# EAGLE board out-7.1 (EAGLE 6.0), part 1 of 3
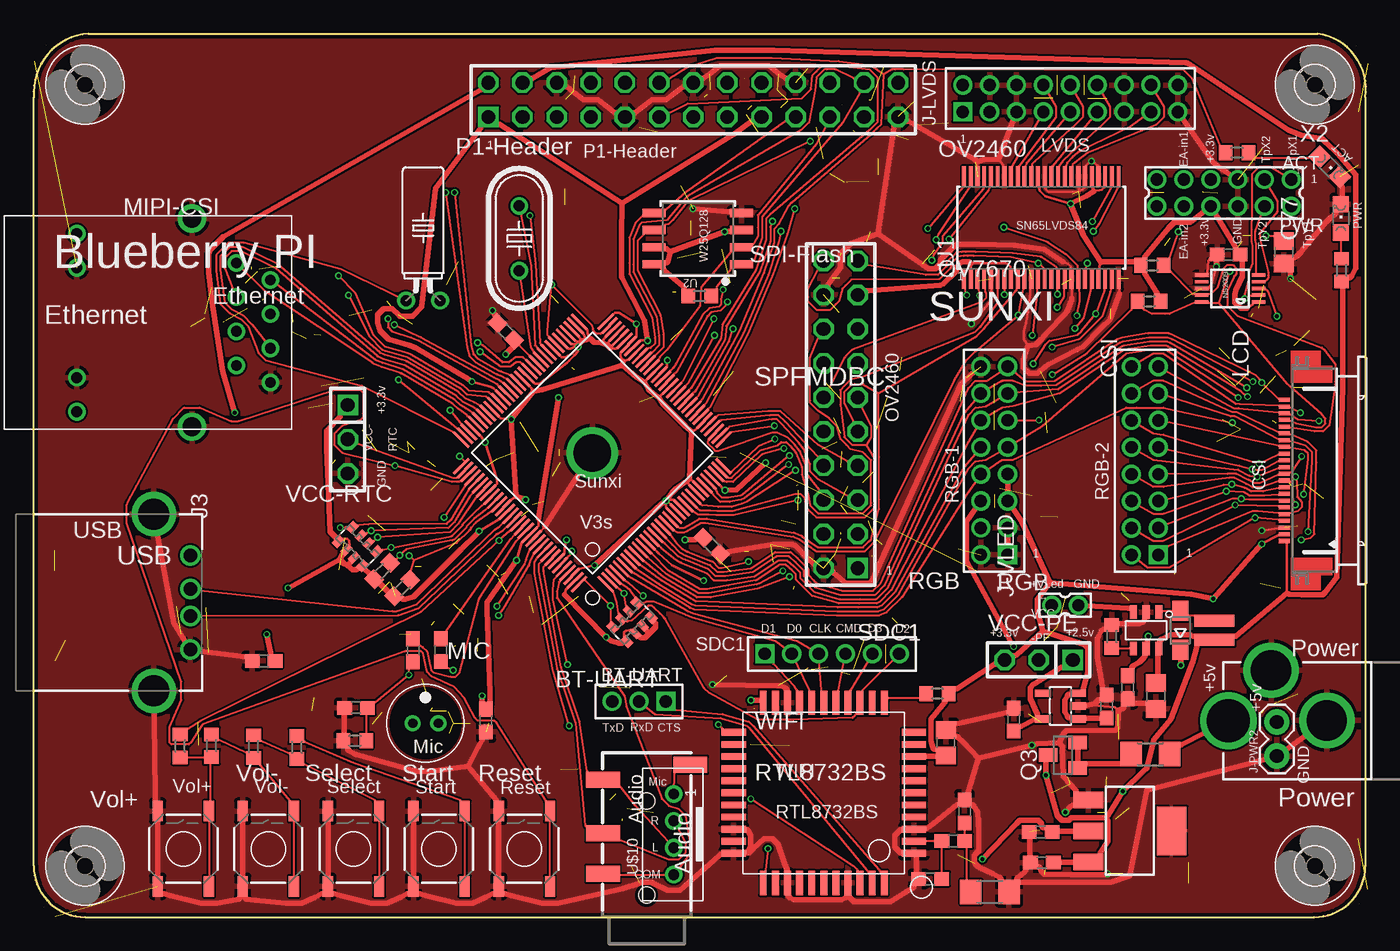
[diagram p0: board, top side]
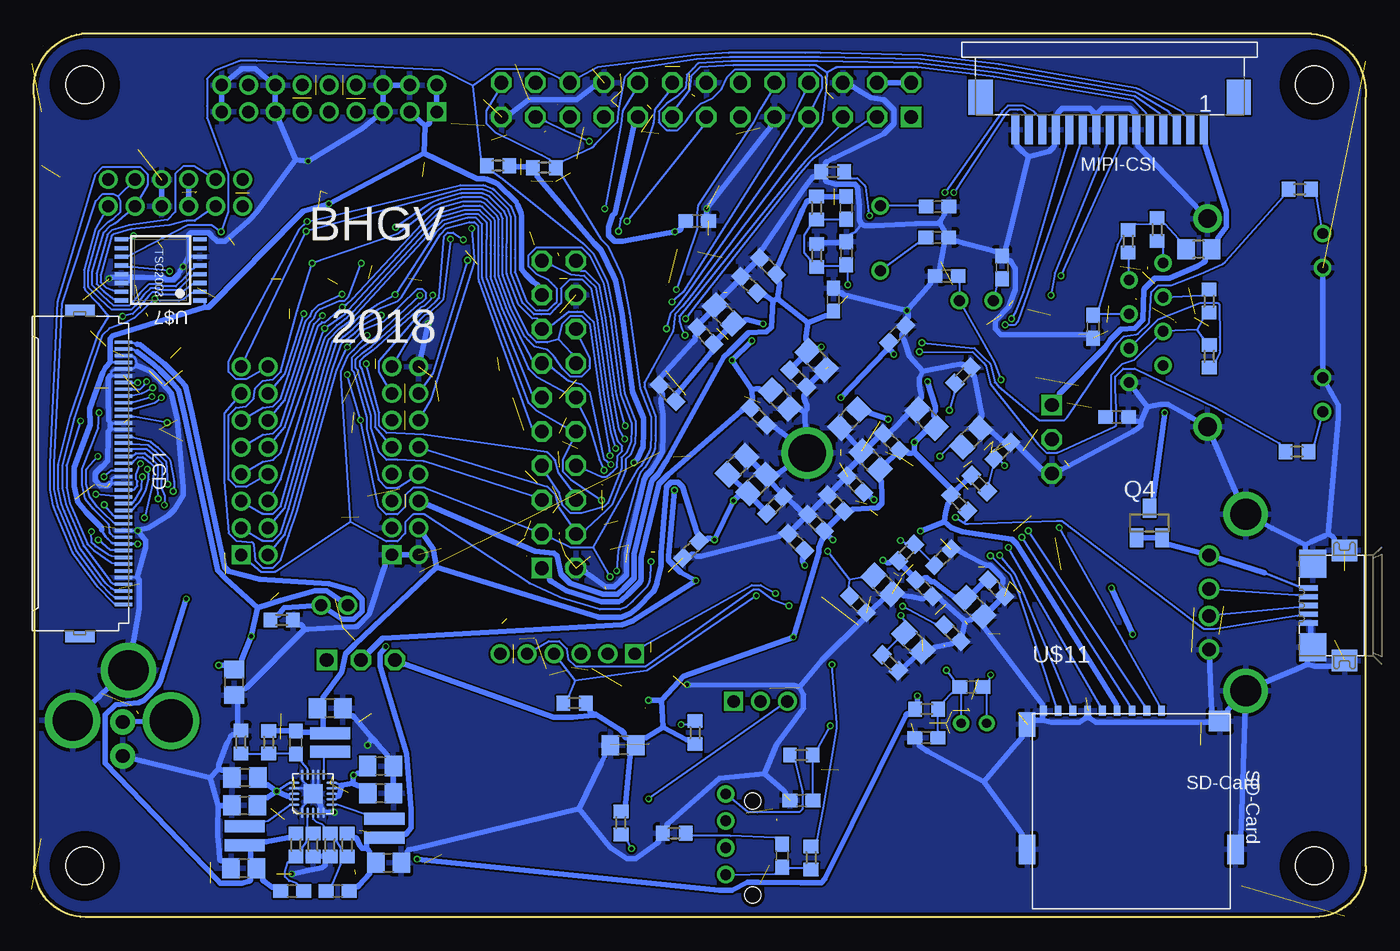
[diagram p1: board, bottom side, seen from below]

Size 99.11 x 65.7 mm. Coordinates in mm from the lower left corner, seen from the top.
Outline: 3.82,0 95.26,0 arc90 99.07,3.81 99.07,60.96 arc90 95.51,65.7 4.07,65.7 arc90 0.01,60.96 0.01,3.81 arc90 3.82,0
Copper layers 1+16: TOP 0.035mm / dielectric 0.15mm / BOTTOM 0.035mm
Design rules: minimum track width 0.1524mm, track to track 0.1524mm, copper to edge 0.254mm, minimum pad ring 0.1mm, minimum via ring 0.1mm
Net classes: 0 default: width 0.152 mm, clearance 0.152 mm; 1 pwr: width 0.178 mm, clearance 0.3 mm to class 0, clearance 0.152 mm

## Footprints (pad centres in the part's own frame; a part is rotated, then mirrored left to right if it is on the bottom)
R1206 = smd 1.6 x 1.803: 1 -1.422,0; 2 1.422,0
C0603 = smd 1.1 x 1: 1 -0.85,0; 2 0.85,0
C0805 = smd 1.3 x 1.5: 1 -0.95,0; 2 0.95,0
C0805' = smd 1.3 x 1.5: 1 -0.85,0; 2 0.85,0
SOD323-W = smd 1.5 x 1.2: A 1.45,0; C -1.45,0
2,8 = hole 2.8: 0,0
SOT223 = smd 1.219 x 2.235: 1 -2.311,-3.099; 2 0,-3.099; 3 2.311,-3.099 | smd 3.6 x 2.2: 4 0,3.099
AUDIO_JACK_3.5MM_TRRS_SMD_RA = smd 1.2 x 2.5: EARTH 11.3,-3.25; RING1 6.2,3.25; RING2 3.2,3.25; TIP 10.2,3.25 | hole 1.2: 8.6,0; 1.6,0
USB-A-FEMALE = drill 1 pad 1.508: 1 -3.5,2.71; 2 -1,2.71; 3 1,2.71; 4 3.5,2.71 | drill 2.3 pad 3.316: P$1 6.57,0; P$2 -6.57,0
68611514122 = smd 0.6 x 2.2: 1 -7,2.4; 2 -6,2.4; 3 -5,2.4; 4 -4,2.4; 5 -3,2.4; 6 -2,2.4; 7 -1,2.4; 8 0,2.4; 9 1,2.4; 10 2,2.4; 11 3,2.4; 12 4,2.4; 13 5,2.4; 14 6,2.4; 15 7,2.4 | smd 1.8 x 2.6: Z1 -9.6,0; Z2 9.6,0
52745-2290 = smd 0.3 x 0.8: 1 -5.25,2.5; 2 -4.75,2.5; 3 -4.25,2.5; 4 -3.75,2.5; 5 -3.25,2.5; 6 -2.75,2.5; 7 -2.25,2.5; 8 -1.75,2.5; 9 -1.25,2.5; 10 -0.75,2.5; 11 -0.25,2.5; 12 0.25,2.5; 13 0.75,2.5; 14 1.25,2.5; 15 1.75,2.5; 16 2.25,2.5; 17 2.75,2.5; 18 3.25,2.5; 19 3.75,2.5; 20 4.25,2.5; 21 4.75,2.5; 22 5.25,2.5
XF2H-4015-1LW = smd 1.3 x 0.25: 1 3.175,9.75; 2 3.175,9.25; 3 3.175,8.75; 4 3.175,8.25; 5 3.175,7.75; 6 3.175,7.25; 7 3.175,6.75; 8 3.175,6.25; 9 3.175,5.75; 10 3.175,5.25; 11 3.175,4.75; 12 3.175,4.25; 13 3.175,3.75; 14 3.175,3.25; 15 3.175,2.75; 16 3.175,2.25; 17 3.175,1.75; 18 3.175,1.25; 19 3.175,0.75; 20 3.175,0.25; 21 3.175,-0.25; 22 3.175,-0.75; 23 3.175,-1.25; 24 3.175,-1.75; 25 3.175,-2.25; 26 3.175,-2.75; 27 3.175,-3.25; 28 3.175,-3.75; 29 3.175,-4.25; 30 3.175,-4.75; 31 3.175,-5.25; 32 3.175,-5.75; 33 3.175,-6.25; 34 3.175,-6.75; 35 3.175,-7.25; 36 3.175,-7.75; 37 3.175,-8.25; 38 3.175,-8.75; 39 3.175,-9.25; 40 3.175,-9.75 | smd 2.2 x 0.8: M1 -0.075,12.15; M2 -0.075,-12.15
PINHEAD_2X09M = drill 0.914 pad 1.422 square: 1 -8,-1 | drill 0.914 pad 1.422: 2 -8,1; 3 -6,-1; 4 -6,1; 5 -4,-1; 6 -4,1; 7 -2,-1; 8 -2,1; 9 0,-1; 10 0,1; 11 2,-1; 12 2,1; 13 4,-1; 14 4,1; 15 6,-1; 16 6,1; 17 8,-1; 18 8,1
POWER_JACK_PTH_LOCK = drill 2.997 pad 4.115: GND 0.025,6.557; GNDBREAK 3.762,10.7 | drill 3.2 pad 4.216: PWR 0,13.878
1X02 = drill 1.016 pad 1.88: 1 0,0; 2 2.54,0
87758-0216 = drill 0.9 pad 1.408: 1 0,-1; 2 0,1
2X13 = drill 1.016 pad 1.524 square: 1 -15.24,-1.27 | drill 1.016 pad 1.524 octagon: 2 -15.24,1.27; 3 -12.7,-1.27; 4 -12.7,1.27; 5 -10.16,-1.27; 6 -10.16,1.27; 7 -7.62,-1.27; 8 -7.62,1.27; 9 -5.08,-1.27; 10 -5.08,1.27; 11 -2.54,-1.27; 12 -2.54,1.27; 13 0,-1.27; 14 0,1.27; 15 2.54,-1.27; 16 2.54,1.27; 17 5.08,-1.27; 18 5.08,1.27; 19 7.62,-1.27; 20 7.62,1.27; 21 10.16,-1.27; 22 10.16,1.27; 23 12.7,-1.27; 24 12.7,1.27; 25 15.24,-1.27; 26 15.24,1.27
1X06M = drill 0.914 pad 1.422 square: 1 -5,0 | drill 0.914 pad 1.422: 2 -3,0; 3 -1,0; 4 1,0; 5 3,0; 6 5,0
1X03 = drill 1.016 pad 1.524 square: 1 -2.54,0 | drill 1.016 pad 1.524 octagon: 2 0,0; 3 2.54,0
1X03M = drill 0.914 pad 1.422 square: 1 -2,0 | drill 0.914 pad 1.422: 2 0,0; 3 2,0
2X10 = drill 1.016 pad 1.524 square: 1 -11.43,-1.27 | drill 1.016 pad 1.524 octagon: 2 -11.43,1.27; 3 -8.89,-1.27; 4 -8.89,1.27; 5 -6.35,-1.27; 6 -6.35,1.27; 7 -3.81,-1.27; 8 -3.81,1.27; 9 -1.27,-1.27; 10 -1.27,1.27; 11 1.27,-1.27; 12 1.27,1.27; 13 3.81,-1.27; 14 3.81,1.27; 15 6.35,-1.27; 16 6.35,1.27; 17 8.89,-1.27; 18 8.89,1.27; 19 11.43,-1.27; 20 11.43,1.27
2X08M = drill 0.914 pad 1.422 square: 1 -7,-1 | drill 0.914 pad 1.422: 2 -7,1; 3 -5,-1; 4 -5,1; 5 -3,-1; 6 -3,1; 7 -1,-1; 8 -1,1; 9 1,-1; 10 1,1; 11 3,-1; 12 3,1; 13 5,-1; 14 5,1; 15 7,-1; 16 7,1
ODD-INDUCTOR = smd 0.9 x 3: P$1 -0.7,0; P$2 0.7,0
L0805 = smd 1.3 x 1.5: 1 -0.95,0; 2 0.95,0
CHIPLED_0805 = smd 1.2 x 1.2: A 0,-1.05; C 0,1.05
F6035AP = drill 0.7 pad 1.208: 1 0,0.95; 2 0,-0.95
HC49U-V = drill 0.813 pad 1.321: 1 -2.413,0; 2 2.413,0
TC38H = drill 0.813 pad 1.321: 1 -1.27,0; 2 1.27,0
SOT23 = smd 1 x 1.4: 1 -0.95,-1.1; 2 0.95,-1.1; 3 0,1.1
R0603 = smd 1 x 1.1: 1 -0.85,0; 2 0.85,0
EXB38V = smd 0.6 x 0.8: 1 -1.275,-0.75; 4 1.275,-0.75; 5 1.275,0.75; 8 -1.275,0.75 | smd 0.5 x 0.8: 2 -0.4,-0.75; 3 0.4,-0.75; 6 0.4,0.75; 7 -0.4,0.75
SPARKFUN-SWITCHES_TACTILE_SWITCH_SMD_5.2MM = smd 1.524 x 0.762: 1 -2.794,1.905; 2 2.794,1.905; 3 -2.794,-1.905; 4 2.794,-1.905
TFSOP-48-6.1MM = smd 1.5 x 0.29: 1 -3.8,5.75; 2 -3.8,5.25; 3 -3.8,4.75; 4 -3.8,4.25; 5 -3.8,3.75; 6 -3.8,3.25; 7 -3.8,2.75; 8 -3.8,2.25; 9 -3.8,1.75; 10 -3.8,1.25; 11 -3.8,0.75; 12 -3.8,0.25; 13 -3.8,-0.25; 14 -3.8,-0.75; 15 -3.8,-1.25; 16 -3.8,-1.75; 17 -3.8,-2.25; 18 -3.8,-2.75; 19 -3.8,-3.25; 20 -3.8,-3.75; 21 -3.8,-4.25; 22 -3.8,-4.75; 23 -3.8,-5.25; 24 -3.8,-5.75; 25 3.8,-5.75; 26 3.8,-5.25; 27 3.8,-4.75; 28 3.8,-4.25; 29 3.8,-3.75; 30 3.8,-3.25; 31 3.8,-2.75; 32 3.8,-2.25; 33 3.8,-1.75; 34 3.8,-1.25; 35 3.8,-0.75; 36 3.8,-0.25; 37 3.8,0.25; 38 3.8,0.75; 39 3.8,1.25; 40 3.8,1.75; 41 3.8,2.25; 42 3.8,2.75; 43 3.8,3.25; 44 3.8,3.75; 45 3.8,4.25; 46 3.8,4.75; 47 3.8,5.25; 48 3.8,5.75
SOIC-8 = smd 0.61 x 1.702: 1 -1.905,-3.251; 2 -0.635,-3.251; 3 0.635,-3.251; 4 1.905,-3.251; 5 1.905,3.251; 6 0.635,3.251; 7 -0.635,3.251; 8 -1.905,3.251
QFP-128 = smd 0.2 x 1.6: 1 -6.2,-7.6; 2 -5.8,-7.6; 3 -5.4,-7.6; 4 -5,-7.6; 5 -4.6,-7.6; 6 -4.2,-7.6; 7 -3.8,-7.6; 8 -3.4,-7.6; 9 -3,-7.6; 10 -2.6,-7.6; 11 -2.2,-7.6; 12 -1.8,-7.6; 13 -1.4,-7.6; 14 -1,-7.6; 15 -0.6,-7.6; 16 -0.2,-7.6; 17 0.2,-7.6; 18 0.6,-7.6; 19 1,-7.6; 20 1.4,-7.6; 21 1.8,-7.6; 22 2.2,-7.6; 23 2.6,-7.6; 24 3,-7.6; 25 3.4,-7.6; 26 3.8,-7.6; 27 4.2,-7.6; 28 4.6,-7.6; 29 5,-7.6; 30 5.4,-7.6; 31 5.8,-7.6; 32 6.2,-7.6; 65 6.2,7.6; 66 5.8,7.6; 67 5.4,7.6; 68 5,7.6; 69 4.6,7.6; 70 4.2,7.6; 71 3.8,7.6; 72 3.4,7.6; 73 3,7.6; 74 2.6,7.6; 75 2.2,7.6; 76 1.8,7.6; 77 1.4,7.6; 78 1,7.6; 79 0.6,7.6; 80 0.2,7.6; 81 -0.2,7.6; 82 -0.6,7.6; 83 -1,7.6; 84 -1.4,7.6; 85 -1.8,7.6; 86 -2.2,7.6; 87 -2.6,7.6; 88 -3,7.6; 89 -3.4,7.6; 90 -3.8,7.6; 91 -4.2,7.6; 92 -4.6,7.6; 93 -5,7.6; 94 -5.4,7.6; 95 -5.8,7.6; 96 -6.2,7.6 | smd 1.6 x 0.2: 33 7.6,-6.2; 34 7.6,-5.8; 35 7.6,-5.4; 36 7.6,-5; 37 7.6,-4.6; 38 7.6,-4.2; 39 7.6,-3.8; 40 7.6,-3.4; 41 7.6,-3; 42 7.6,-2.6; 43 7.6,-2.2; 44 7.6,-1.8; 45 7.6,-1.4; 46 7.6,-1; 47 7.6,-0.6; 48 7.6,-0.2; 49 7.6,0.2; 50 7.6,0.6; 51 7.6,1; 52 7.6,1.4; 53 7.6,1.8; 54 7.6,2.2; 55 7.6,2.6; 56 7.6,3; 57 7.6,3.4; 58 7.6,3.8; 59 7.6,4.2; 60 7.6,4.6; 61 7.6,5; 62 7.6,5.4; 63 7.6,5.8; 64 7.6,6.2; 97 -7.6,6.2; 98 -7.6,5.8; 99 -7.6,5.4; 100 -7.6,5; 101 -7.6,4.6; 102 -7.6,4.2; 103 -7.6,3.8; 104 -7.6,3.4; 105 -7.6,3; 106 -7.6,2.6; 107 -7.6,2.2; 108 -7.6,1.8; 109 -7.6,1.4; 110 -7.6,1; 111 -7.6,0.6; 112 -7.6,0.2; 113 -7.6,-0.2; 114 -7.6,-0.6; 115 -7.6,-1; 116 -7.6,-1.4; 117 -7.6,-1.8; 118 -7.6,-2.2; 119 -7.6,-2.6; 120 -7.6,-3; 121 -7.6,-3.4; 122 -7.6,-3.8; 123 -7.6,-4.2; 124 -7.6,-4.6; 125 -7.6,-5; 126 -7.6,-5.4; 127 -7.6,-5.8; 128 -7.6,-6.2 | drill 2.8 pad 3.816: P$1 0,0
LGA = smd 1.8 x 0.51: P$1 -0.7,10.5; P$2 -0.7,9.6; P$3 -0.7,8.7; P$4 -0.7,7.8; P$5 -0.7,6.9; P$6 -0.7,6; P$7 -0.7,5.1; P$8 -0.7,4.2; P$9 -0.7,3.3; P$10 -0.7,2.4; P$11 -0.7,1.5; P$23 12.7,1.5; P$24 12.7,2.4; P$25 12.7,3.3; P$26 12.7,4.2; P$27 12.7,5.1; P$28 12.7,6; P$29 12.7,6.9; P$30 12.7,7.8; P$31 12.7,8.7; P$32 12.7,9.6; P$33 12.7,10.5 | smd 0.51 x 1.8: P$12 1.5,-0.7; P$13 2.4,-0.7; P$14 3.3,-0.7; P$15 4.2,-0.7; P$16 5.1,-0.7; P$17 6,-0.7; P$18 6.9,-0.7; P$19 7.8,-0.7; P$20 8.7,-0.7; P$21 9.6,-0.7; P$22 10.5,-0.7; P$34 10.5,12.7; P$35 9.6,12.7; P$36 8.7,12.7; P$37 7.8,12.7; P$38 6.9,12.7; P$39 6,12.7; P$40 5.1,12.7; P$41 4.2,12.7; P$42 3.3,12.7; P$43 2.4,12.7; P$44 1.5,12.7
RJ45 = drill 0.8 pad 1.308: 1 -6.03,-4.12; 2 -8.57,-2.86; 3 -6.03,-1.58; 4 -8.57,-0.32; 5 -6.03,0.96; 6 -8.57,2.22; 7 -6.03,3.5; 8 -8.57,4.76; 9 5.84,-6.305; 10 5.84,-3.765; 11 5.84,4.405; 12 5.84,6.945 | drill 1.4 pad 2.1: SHIELD1 -2.73,-7.425; SHIELD2 -2.73,8.065
QFN20 = smd 0.8 x 0.2: 1 -1.4,0.8; 2 -1.4,0.4; 3 -1.4,0; 4 -1.4,-0.4; 5 -1.4,-0.8; 11 1.4,-0.8; 12 1.4,-0.4; 13 1.4,0; 14 1.4,0.4; 15 1.4,0.8 | smd 0.2 x 0.8: 6 -0.8,-1.4; 7 -0.4,-1.4; 8 0,-1.4; 9 0.4,-1.4; 10 0.8,-1.4; 16 0.8,1.4; 17 0.4,1.4; 18 0,1.4; 19 -0.4,1.4; 20 -0.8,1.4 | smd 1.4 x 1.4: 21 0,0
ZX62R-B-5P = smd 1.35 x 0.4: 1 2.675,-1.3; 2 2.675,-0.65; 3 2.675,0; 4 2.675,0.65; 5 2.675,1.3 | smd 1.9 x 1.6: M1 0,-4.1; M2 0,4.1 | smd 2 x 2.1: M3 2.35,3.1; M4 2.35,-3.1
SOT25 = smd 0.55 x 1.2: 1 -0.95,-1.3; 2 0,-1.3; 3 0.95,-1.3; 4 0.95,1.3; 5 -0.95,1.3
TSSOP16 = smd 0.305 x 0.991: 1 -2.275,-2.918; 2 -1.625,-2.918; 3 -0.975,-2.918; 4 -0.325,-2.918; 5 0.325,-2.918; 6 0.975,-2.918; 7 1.625,-2.918; 8 2.275,-2.918; 9 2.275,2.918; 10 1.625,2.918; 11 0.975,2.918; 12 0.325,2.918; 13 -0.325,2.918; 14 -0.975,2.918; 15 -1.625,2.918; 16 -2.275,2.918
MSOP10 = smd 0.25 x 1: 1 -1,-2.113; 2 -0.5,-2.113; 3 0,-2.113; 4 0.5,-2.113; 5 1,-2.113; 6 1,2.113; 7 0.5,2.113; 8 0,2.113; 9 -0.5,2.113; 10 -1,2.113
SOT23-6 = smd 1 x 0.55: 1 -1.35,0.95; 2 -1.35,0; 3 -1.35,-0.95; 4 1.35,-0.95; 5 1.35,0; 6 1.35,0.95
JST_B4B-PH_HEADER = drill 0.8 pad 1.308: P1 2.98,0.048; P2 0.98,0.048; P3 -1.02,0.048; P4 -3.02,0.048
MICROSD-PUSH-OUT = smd 0.5 x 0.75: 1 9.625,0.225; 2 8.525,0.225; 3 7.425,0.225; 4 6.325,0.225; 5 5.225,0.225; 6 4.125,0.225; 7 3.025,0.225; 8 1.925,0.225; CD 0.825,0.225 | smd 1.2 x 1.8: G1 -0.375,-0.8 | smd 1.2 x 2.2: G2 -0.375,-10.1; G4 15.125,-10.1 | smd 1.6 x 1.5: G3 13.95,-0.55
87758-1216 = drill 0.9 pad 1.408: 1 -5,-1; 2 -5,1; 3 -3,-1; 4 -3,1; 5 -1,-1; 6 -1,1; 7 1,-1; 8 1,1; 9 3,-1; 10 3,1; 11 5,-1; 12 5,1

## Placement (x,y rotation side)
ANT1  [R1206]  71.14,1.88 180 top
C1  100nF  [C0603]  49.74,51.77 0 bottom
C2  100nF  [C0603]  88.89,49.26 180 top
C3  10µF  [C0805]  67.86,12.97 90 top
C4  1µF  [C0603]  68.41,5.65 0 top
C5  1µF  [C0603]  66.7,2.85 180 top
C6  1µF  [C0603]  69.26,7.85 90 top
C7  10µF  [C0805]  29.38,35.66 45 bottom
C8  18pF  [C0603]  27.07,48.31 90 bottom
C9  100nF  [C0603]  17.13,19.06 180 top
C10  18pF  [C0603]  31.19,47.67 180 bottom
C11  18pF  [C0603]  31.86,52.83 180 bottom
C12  18pF  [C0603]  31.89,50.54 180 bottom
C13  1µF  [C0603]  27.05,34.68 45 bottom
C14  100nF  [C0603]  38.67,52.74 90 bottom
C15  100nF  [C0603]  38.65,49.37 270 bottom
C16  10µF  [C0805]  29.13,23.06 135 bottom
C17  1µF  [C0603]  41.99,8.68 180 bottom
C18  100nF  [C0603]  43.41,4.56 270 bottom
C19  100nF  [C0603]  27.49,24.46 135 bottom
C20  10µF  [C0805]  33.66,20.45 135 bottom
C21  1µF  [C0603]  30.75,21.11 135 bottom
C22  100nF  [C0603]  37.77,23.25 315 bottom
C23  33pF  [C0603]  32.7,13.34 0 bottom
C24  33pF  [C0603]  23.98,15.56 0 top
C25  100pF  [C0603]  29.34,17.11 180 bottom
C26  33pF  [C0603]  33.64,14.62 90 top
C27  100nF  [C0603]  30.3,19.85 270 top
C28  100nF  [C0603]  28.23,19.84 270 top
C29  10µF  [C0805]  35.95,24.71 135 bottom
C30  10µF  [C0805]  55.25,12.78 180 bottom
C31  100nf  [C0603]  79.82,15.66 90 top
C32  10µF  [C0805]  73.3,9.21 0 bottom
C33  10µF  [C0805]  83.39,10.39 180 bottom
C34  1nF  [C0603]  31.48,26.76 225 bottom
C35  10µF  [C0805]  73.31,11.23 0 bottom
C36  100nf  [C0603]  75.01,4.05 180 top
C37  100nf  [C0603]  74.91,6.34 180 top
C38  10µF  [C0603]  45.89,47.04 315 bottom
C39  1µF  [C0603]  42.23,40.05 315 bottom
C40  10µF  [C0805]  83.41,8.31 180 bottom
C41  18pF  [C0603]  79.6,12.98 270 bottom
C42  18pF  [C0603]  76.5,1.95 180 bottom
C43  10µF  [C0805]  72.71,4.04 180 bottom
C44  10µF  [C0805]  77.06,15.52 180 bottom
C45  18pF  [C0603]  79.88,1.93 0 bottom
C46  10µF  [C0805]  83.47,3.63 0 bottom
C47  1µF  [C0603]  44.47,48.41 135 bottom
C48  100nF  [C0603]  18.51,37.19 0 bottom
C49  100nF  [C0603]  20.29,43.9 270 bottom
C50  100nF  [C0805]  40.86,41.4 315 bottom
C51  100nF  [C0603]  39.61,45.92 90 bottom
C52  100nF  [C0805]  47.75,44.81 135 bottom
C53  100nF  [C0603]  49.14,43.23 135 bottom
C54  1µF  [C0805]  45.27,32.21 45 bottom
C55  1µF  [C0603]  50.45,27.61 315 top
C56  10µF  [C0603]  42.37,27.9 135 bottom
C57  100nF  [C0603]  40.9,29.34 135 bottom
C58  100nF  [C0603]  35.29,35.33 135 bottom
C59  1µF  [C0805]  36.84,33.96 135 bottom
C60  10µF  [C0603]  39.43,30.77 135 bottom
C61  1µF  [C0805]  43.58,38.5 315 bottom
C62  100nF  [C0603]  37.98,32.19 135 bottom
C63  100nF  [C0805]  46.78,33.6 45 bottom
C64  1µF  [C0603]  51.96,38.96 135 bottom
C65  1µF  [C0603]  43.96,30.63 45 bottom
C66  10µF  [C0805]  38.42,37.07 225 bottom
C67  100nF  [C0603]  50.2,27.33 225 bottom
C68  100nF  [C0603]  32.86,24.45 315 bottom
C69  100nF  [C0805]  32.68,37.06 135 bottom
C70  100nF  [C0603]  45.19,37.23 315 bottom
C71  10µF  [C0603]  34.87,43.36 45 bottom
C72  100nF  [C0603]  35.12,43.55 135 top
C73  10µF  [C0805]  83.48,16.44 270 top
C74  10µF  [C0805]  84.19,17.46 270 bottom
C75  100nf  [C0603]  81.39,17.09 270 top
C76  100nf  [C0603]  72.91,14.69 90 top
C77  [C0805']  93.01,49.44 270 top
D1  [SOD323-W]  85.3,21.33 90 top
F1  2A  [R1206]  83.07,12.12 180 top
H1  [2,8]  95.31,3.81 0 top
H2  [2,8]  3.82,3.81 0 top
H3  [2,8]  3.82,61.9 0 top
H4  [2,8]  95.31,61.9 0 top
IC1  [SOT223]  81.56,6.41 270 top
J2  AUDIO_JACK_SMD  [AUDIO_JACK_3.5MM_TRRS_SMD_RA]  45.61,0.03 90 top
J3  USB-A-FEMALE  [USB-A-FEMALE]  8.95,23.39 270 top
J4  [68611514122]  19.06,60.96 180 bottom
J-CAM-FFC  52745-2290  [52745-2290]  95.54,33.22 90 top
J-LCD-FFC  [XF2H-4015-1LW]  95.59,33 0 bottom
J-LVDS  [PINHEAD_2X09M]  77.12,60.88 0 top
J-PWR  POWER_JACKPTH_LOCK  [POWER_JACK_PTH_LOCK]  102.76,14.6 90 top
J-PWR2  [1X02]  92.48,11.97 90 top
J-VLED  87758-0216  [87758-0216]  76.73,23.2 270 top
JP1  [2X13]  49.07,60.78 0 top
JP2  [1X06M]  59.4,19.58 0 top
JP3  [1X03]  74.77,19.13 180 top
JP5  [1X03]  23.36,35.53 270 top
JP7  [1X03M]  45.04,16.04 180 top
JP10  OV2640  [2X10]  60.03,37.38 90 top
JP11  [2X08M]  82.67,33.94 90 top
JP12  [2X08M]  71.46,33.94 90 top
L1  2,2µH  [ODD-INDUCTOR]  87.84,21.33 90 top
L2  10µH  [L0805]  12.43,49.66 180 bottom
L3  2,2µH  [ODD-INDUCTOR]  77.06,12.98 270 bottom
L4  2,2µH  [ODD-INDUCTOR]  73.02,6.62 90 bottom
L5  2,2µH  [ODD-INDUCTOR]  83.41,6.05 90 bottom
LED1  [CHIPLED_0805]  97.25,51.96 0 top
LED2  [CHIPLED_0805]  96.42,55.8 225 top
MIC  [F6035AP]  29.15,14.41 90 top
Q1  24Mhz  [HC49U-V]  36.13,50.47 270 top
Q2  32kHz  [TC38H]  28.98,45.85 0 top
Q3  IRLML2402  [SOT23]  76.57,12.04 90 top
Q4  IRLML2402  [SOT23]  16.1,29.3 0 bottom
R1  47k  [R0603]  25.93,25.74 225 top
R2  47k  [R0603]  27.42,24.48 225 top
R7  150k  [R0603]  81.62,13 270 bottom
R8  10k  [R0603]  49.54,46.18 0 top
R9  100k  [R0603]  67.24,16.61 180 top
R10  100k  [R0603]  55.42,7 90 bottom
R11  47k  [R0603]  28.75,32.24 135 bottom
R12  240 - 1%  [R0603]  39.66,55.42 180 bottom
R13  2k - 1%  [R0603]  40.86,52.73 90 bottom
R14  2k - 1%  [R0603]  40.85,49.2 270 bottom
R15  22  [R0603]  51.46,6.24 0 bottom
R16  1k  [R0603]  97.3,48.11 270 top
R17  1k  [R0603]  89.52,56.85 180 top
R19  10k  [R0603]  49.9,13.72 270 bottom
R20  6k8  [R0603]  10.89,12.72 90 top
R21  8k2  [R0603]  13.23,12.75 270 top
R22  10k  [R0603]  16.36,12.67 270 top
R23  11k  [R0603]  19.58,12.62 270 top
R24  6k 1%  [R0603]  29.97,40.29 45 bottom
R25  2k  [R0603]  41.99,12.05 0 bottom
R26  0  [R0603]  41.27,4.4 270 bottom
R27  200k 1%  [R0603]  35.38,18.91 135 bottom
R28  2k  [R0603]  23.9,13.12 180 top
R29  47k  [R0603]  34.18,27.11 225 bottom
R30  2k  [R0603]  32.67,15.46 180 bottom
R32  47k  [R0603]  30.25,30.79 315 bottom
R36  47k  [R0603]  58.87,15.91 180 bottom
R38  10k  [R0603]  82.99,45.79 180 top
R39  10k  [R0603]  83.22,48.47 0 top
R40  49.9  [R0603]  11.67,45.81 270 bottom
R41  49.9  [R0603]  11.65,41.71 90 bottom
R42  49.9  [R0603]  15.53,51.12 90 bottom
R43  49.9  [R0603]  17.69,50.26 90 bottom
R44  10k  [R0603]  61.11,55.73 0 bottom
R45  10k  [R0603]  64.56,55.88 180 bottom
R46  10k  [R0603]  80.2,20.87 90 top
R47  [R0603]  80.66,22.1 0 bottom
R52  1k  [R0603]  5.12,34.61 0 bottom
R53  1k  [R0603]  4.92,54.12 0 bottom
R54  150k  [R0603]  83.68,13.02 270 bottom
R55  200k  [R0603]  75.79,5.36 270 bottom
R56  100k  [R0603]  77.06,5.36 90 bottom
R57  680k  [R0603]  79.6,5.36 270 bottom
R58  150k  [R0603]  78.33,5.36 90 bottom
RN1  [EXB38V]  44.51,21.92 45 top
RN2  [EXB38V]  24.09,27.56 315 top
S-RST  [SPARKFUN-SWITCHES_TACTILE_SWITCH_SMD_5.2MM]  36.5,5.08 90 top
S-SEL  [SPARKFUN-SWITCHES_TACTILE_SWITCH_SMD_5.2MM]  23.8,5.08 90 top
S-START  [SPARKFUN-SWITCHES_TACTILE_SWITCH_SMD_5.2MM]  30.15,5.08 90 top
S-VOL+  [SPARKFUN-SWITCHES_TACTILE_SWITCH_SMD_5.2MM]  11.15,5.08 90 top
S-VOL-  [SPARKFUN-SWITCHES_TACTILE_SWITCH_SMD_5.2MM]  17.45,5.08 90 top
U1  SN65LVDS84AQDGGRQ1  [TFSOP-48-6.1MM]  74.96,51.27 90 top
U2  W25Q32FV  [SOIC-8]  49.41,50.46 90 top
U$1  [QFP-128]  41.57,34.52 45 top
U$2  [LGA]  64.78,15.24 180 top
U$3  [RJ45]  9.05,44.52 180 top
U$4  EA3036  [QFN20]  78.33,9.17 90 bottom
U$5  [ZX62R-B-5P]  1.59,23.17 180 bottom
U$6  XC6204  [SOT25]  76.39,15.7 90 top
U$7  TSC2003  [TSSOP16]  89.66,48.13 90 bottom
U$8  NS2009  [MSOP10]  89,46.75 90 top
U$9  [SOT23-6]  82.76,21.33 270 top
U$10  JST-PH_4-PIN_HEADER  [JST_B4B-PH_HEADER]  47.67,6.18 90 top
U$11  MICROSD-PUSH-OUT  [MICROSD-PUSH-OUT]  24.82,15.13 0 bottom
X2  87758-1216  [87758-1216]  88.57,53.85 180 top

## Library data of the parts
ANT1 C1-C31 C34 C36-C39 C41 C42 C45 C47-C76 L1-L5 R1 R2 R7-R17 R19-R30 R32 R36 R38-R47 R52-R58 = rcl
C32 C33 C35 C40 C43 C44 C46 = rcl@1; SPICEPREFIX: C
C77 = resistor
D1 = diode
F1 J-LCD-FFC = adafruit
H1 H2 H4 = holes
H3 = holes@1
IC1 = v-reg-2
J2 = SparkFun-Connectors; PROD_ID: CONN-10676; SF_ID: PRT-12639
J3 = Connectors
J4 = EAGLE-FPC_CONNECTOR_AND_FFC_CAB-rev16b
J-CAM-FFC = con-molex; OC_FARNELL: unknown; OC_NEWARK: unknown
J-LVDS = Blueberry Pi
J-PWR = SparkFun-Connectors; PROD_ID: CONN-08197; SF_ID: PRT-00119
J-PWR2 = SparkFun-Connectors
J-VLED = con-molex; MPN: 87758-0216; OC_FARNELL: unknown; OC_NEWARK: 94M1513
JP1 JP3 JP5 JP7 JP10-JP12 = pinhead
JP2 = pinhead-1
LED1 LED2 = led
MIC = microphon
Q1 = crystal; OC_FARNELL: 1666969; OC_NEWARK: unknown
Q2 = crystal; OC_FARNELL: unknown; OC_NEWARK: unknown
Q3 Q4 = work
RN1 RN2 = resistor-dil; OC_FARNELL: unknown; OC_NEWARK: unknown
S-RST S-SEL S-START S-VOL+ S-VOL- = Blueberry Pi; PROD_ID: SWCH-08247; SF_SKU: COM-08720
U1 = TI
U2 = SparkFun-IC-Memory; PROD_ID: IC-13229
U$1 = Allwinner V3s
U$2 = RTL8723BS_Modul
U$3 = HR911105A
U$4 = EA3036
U$5 = con-hirose
U$6 = XC6204
U$7 = tsc2003
U$8 = NS2009
U$9 = PT4101
U$10 = srg
U$11 = microsd
X2 = con-molex; MPN: 87758-1216; OC_FARNELL: unknown; OC_NEWARK: 25M5671

## Nets
5VNS [pwr]: F1.1 J-PWR2.2 J-PWR.PWR
+1V2 [pwr]: C41.1 C44.2 C52.1 C53.1 C54.1 C55.1 C56.1 C62.1 C63.1 C64.1 C65.1 C66.1 C67.1 JP12.4 L3.P$1 R7.1 U$1.19 U$1.20 U$1.21 U$1.25 U$1.26 U$1.38 U$1.47 U$1.51 U$1.56 U$1.58 U$1.64 U$1.80 U$1.88 U$1.108 U$1.126
+1V8 [pwr]: C14.2 C38.2 C39.1 C42.1 C43.2 C47.1 C50.1 C51.1 JP12.6 L4.P$1 R13.2 R55.1 U$1.59 U$1.60 U$1.61 U$1.62 U$1.65 U$1.66 U$1.67 U$1.68 U$1.69 U$1.70 U$1.72 U$1.79
+2V5 [pwr]: C76.1 JP3.1 U$6.5
+3V3 [pwr]: C1.1 C2.1 C3.1 C9.1 C30.1 C31.1 C45.1 C46.2 C57.1 C58.1 C59.1 C60.1 C61.1 C69.1 C70.1 J4.1 J-CAM-FFC.2 J-LCD-FFC.4 J-LCD-FFC.31 J-LVDS.1 J-LVDS.2 J-LVDS.3 JP1.1 JP1.17 JP3.3 JP5.1 JP10.1 JP10.17 JP12.5 JP12.7 L2.1 L5.P$1 R1.2 R2.2 R8.1 R9.1 R10.2 R11.2 R19.2 R32.1 R36.1 R38.1 R39.1 R57.1 RN1.1 RN1.2 RN1.3 RN1.4 RN2.1 RN2.2 RN2.3 RN2.4 U1.2 U1.8 U1.21 U1.27 U1.29 U1.37 U2.3 U2.7 U2.8 U$1.50 U$1.57 U$1.85 U$1.93 U$1.104 U$1.109 U$1.122 U$1.127 U$2.P$9 U$2.P$22 U$6.1 U$6.3 U$7.1 U$8.1 U$11.4 X2.7 X2.8
+3V3A [pwr]: C16.2 C19.2 C26.2 C37.1 C68.1 C71.1 C72.1 IC1.2 R29.2 R30.2 U$1.76 U$1.115
+3V3ANC [pwr]: IC1.4
+5V [pwr]: C32.1 C33.1 C35.1 C36.1 C40.1 C73.1 IC1.3 J-CAM-FFC.1 JP1.2 JP1.4 L1.P$1 Q3.3 Q4.3 R16.2 U$4.7 U$4.8 U$4.9 U$4.10 U$4.16 U$4.18 U$4.19 U$9.6
BT_H_WK: U$2.P$7
BT_WK: U$2.P$6
CLK_N: J-LVDS.15 U1.33
CLK_P: J-LVDS.16 U1.32
CSI_D0/LCD_D2: J-CAM-FFC.14 J-LCD-FFC.23 JP10.20 JP11.12 U1.13 U$1.33
CSI_D1/LCD_D3: J-CAM-FFC.15 J-LCD-FFC.24 JP10.19 JP11.11 U1.15 U$1.32
CSI_D2/LCD_D4: J-CAM-FFC.12 J-LCD-FFC.25 JP10.16 JP11.10 U1.16 U$1.31
CSI_D3/LCD_D5: J-CAM-FFC.13 J-LCD-FFC.26 JP10.15 JP11.9 U1.18 U$1.30
CSI_D4/LCD_D6: J-CAM-FFC.10 J-LCD-FFC.27 JP10.14 JP11.8 U1.19 U$1.28
CSI_D5/LCD_D7: J-CAM-FFC.11 J-LCD-FFC.28 JP10.13 JP11.7 U1.20 U$1.27
CSI_D6/LCD_D10: J-CAM-FFC.8 J-LCD-FFC.15 JP10.12 JP11.6 U1.4 U$1.24
CSI_D7/LCD_D11: J-CAM-FFC.9 J-LCD-FFC.16 JP10.11 JP11.5 U1.6 U$1.23
CSI_D8/LCD_D12: J-CAM-FFC.6 J-LCD-FFC.17 JP10.10 JP11.4 U1.7 U$1.22
CSI_D9/LCD_D13: J-CAM-FFC.7 J-LCD-FFC.18 JP10.9 JP11.3 U1.9 U$1.18
CSI_D10/LCD_D14: J-CAM-FFC.4 J-LCD-FFC.19 JP11.2 U1.10 U$1.17
CSI_D11/LCD_D15: J-CAM-FFC.5 J-LCD-FFC.20 JP11.1 U1.12 U$1.16
CSI_D12/LCD_D18: J-CAM-FFC.22 J-LCD-FFC.7 JP12.15 U1.44 U$1.15
CSI_HSYNC/LCD_HSYNC: J-CAM-FFC.17 J-LCD-FFC.32 JP10.6 JP11.14 U1.22 U$1.35
CSI_MCLK/LCD_DE: J-CAM-FFC.20 J-LCD-FFC.34 JP10.8 JP11.15 U1.25 U$1.36
CSI_PCLK/LCD_CLK: J-CAM-FFC.21 J-LCD-FFC.30 JP10.7 JP11.16 U1.26 U$1.37
CSI_VSYNC/LCD_VSYNC: J-CAM-FFC.16 J-LCD-FFC.33 JP10.5 JP11.13 U1.23 U$1.34
EA-IN1: U$7.16 X2.9
EA-IN2: U$7.15 X2.10
EPHY_RXN: R41.1 U$1.89 U$3.6
EPHY_RXP: R40.1 U$1.90 U$3.3
EPHY_TXN: R43.1 U$1.91 U$3.2
EPHY_TXP: R42.1 U$1.92 U$3.1
GND [pwr]: ANT1.1 C1.2 C2.2 C3.2 C5.2 C6.2 C7.2 C8.2 C9.2 C10.2 C11.1 C12.1 C13.2 C15.1 C16.1 C17.2 C19.1 C20.1 C21.1 C22.2 C23.1 C24.1 C26.1 C29.1 C30.2 C31.2 C32.2 C33.2 C34.1 C35.2 C36.2 C37.2 C38.1 C39.2 C40.2 C43.1 C44.1 C46.1 C47.2 C48.2 C49.2 C50.2 C51.2 C52.2 C53.2 C54.2 C55.2 C56.2 C57.2 C58.2 C59.2 C60.2 C61.2 C62.2 C63.2 C64.2 C65.2 C66.2 C67.2 C68.2 C69.2 C70.2 C71.2 C72.2 C73.2 C74.2 C75.2 C76.2 C77.2 IC1.1 J3.4 J3.P$1 J3.P$2 J4.6 J4.9 J4.12 J4.15 J-CAM-FFC.3 J-LCD-FFC.3 J-LCD-FFC.5 J-LCD-FFC.6 J-LCD-FFC.13 J-LCD-FFC.14 J-LCD-FFC.21 J-LCD-FFC.22 J-LCD-FFC.29 J-LCD-FFC.36 J-LVDS.4 J-LVDS.5 J-LVDS.6 J-LVDS.13 J-LVDS.14 J-LVDS.17 J-LVDS.18 J-PWR2.1 J-PWR.GND J-PWR.GNDBREAK JP1.6 JP1.9 JP1.14 JP1.20 JP1.25 JP5.3 JP10.2 JP10.18 JP12.1 JP12.2 JP12.3 JP12.16 LED1.C LED2.C R12.2 R14.1 R15.1 R24.2 R27.1 R28.2 R46.2 R47.2 R54.1 R56.1 R58.1 S-RST.1 S-RST.2 S-SEL.1 S-SEL.2 S-START.1 S-START.2 S-VOL+.1 S-VOL+.2 S-VOL-.1 S-VOL-.2 U1.5 U1.11 U1.17 U1.24 U1.28 U1.30 U1.31 U1.36 U1.42 U1.46 U2.4 U$1.116 U$1.P$1 U$2.P$1 U$2.P$3 U$2.P$20 U$2.P$31 U$2.P$33 U$2.P$36 U$2.P$41 U$3.8 U$3.10 U$3.11 U$3.SHIELD1 U$3.SHIELD2 U$4.1 U$4.4 U$4.5 U$4.12 U$4.13 U$4.15 U$4.17 U$4.21 U$5.5 U$5.M1 U$5.M2 U$5.M3 U$5.M4 U$6.2 U$7.6 U$7.13 U$7.14 U$8.6 U$8.8 U$9.2 U$11.6 U$11.CD U$11.G1 U$11.G2 U$11.G3 U$11.G4 X2.5 X2.6
HP_COM: C18.2 J2.RING2 R26.2 U$1.125 U$10.P4
HP_COMFB: R26.1 U$1.124
HP_L: J2.TIP U$1.121 U$10.P3
HP_R: J2.RING1 U$1.120 U$10.P2
I2C0/SCL: JP1.5 U$1.45
I2C0/SDA: JP1.3 U$1.46
I2C1/SCL: J4.3 J-CAM-FFC.19 JP1.26 JP10.3 JP12.11 R38.2 R44.2 U$1.9 U$7.12 U$8.10
I2C1/SDA: J4.2 J-CAM-FFC.18 JP1.22 JP10.4 JP12.10 R39.2 R45.2 U$1.8 U$7.11 U$8.9
KEYADC0: C34.2 R20.2 R29.1 U$1.112
LCD_D19: J-LCD-FFC.8 JP12.14 U1.45 U$1.14
LCD_D20: J-LCD-FFC.9 JP12.13 U1.47 U$1.13
LCD_D21: J-LCD-FFC.10 JP12.12 U1.48 U$1.11
LCD_D22: J-LCD-FFC.11 JP12.9 U1.1 U$1.7
LCD_D23: J-LCD-FFC.12 JP12.8 U1.3 U$1.6
LINK_LED: R53.1 U$1.77
MCSI-CK_N: J4.8 U$1.87
MCSI-CK_P: J4.7 U$1.86
MCSI-D0_N: J4.14 U$1.82
MCSI-D0_P: J4.13 U$1.81
MCSI-D1_N: J4.11 U$1.84
MCSI-D1_P: J4.10 U$1.83
MIC_HBIAS: C17.1 R25.2 U$1.119
MIC_HBIAS_O: J2.EARTH R25.1 U$10.P1
MICIN1N: C28.1 U$1.114
MICIN1P: C27.1 U$1.113
MIPI-CSI-MCLK: J4.5 JP1.15 U$1.10
N$1: R24.1 U$1.94
N$3: LED1.A R16.1
N$4: R19.1 U$2.P$23
N$6: LED2.A R17.1
N$7: R9.2 U$2.P$12
N$8: R20.1 R21.2 S-VOL+.3 S-VOL+.4
N$9: R46.1 U$9.4
N$10: D1.A L1.P$2 U$9.1
N$11: C77.1 U$7.9
N$12: R10.1 U$2.P$34
N$13: C4.1 C5.1 U$2.P$2
N$14: ANT1.2 C4.2 C6.1
N$18: R53.2 U$3.9
N$20: R52.2 U$3.12
N$21: C49.1 L2.2 R42.2 R43.2 U$3.4
N$22: C48.1 R40.2 R41.2 U$3.5
N$23: C7.1 U$1.97
N$26: JP5.2 U$1.98
N$28: C22.1 C29.2 U$1.123
N$29: C10.1 Q2.2 U$1.95
N$30: C8.1 Q2.1 U$1.96
N$32: C11.2 Q1.1 U$1.74
N$33: C12.2 Q1.2 U$1.75
N$35: C13.1 R11.1 S-RST.3 S-RST.4 U$1.99
N$36: R12.1 U$1.73
N$41: R21.1 R22.2 S-VOL-.3 S-VOL-.4
N$42: R22.1 R23.2 S-SEL.3 S-SEL.4
N$43: R23.1 S-START.3 S-START.4
N$47: C18.1 R15.2
N$48: C23.2 C25.2 C27.2 MIC.2 R30.1
N$49: C24.2 C25.1 C28.2 MIC.1 R28.1
N$58: L4.P$2 U$4.6
N$59: L3.P$2 U$4.11
N$60: C41.2 R7.2 R54.2 U$4.14
N$61: JP7.1 U$2.P$44
N$62: JP7.2 U$2.P$43
N$63: JP7.3 U$2.P$42
N$69: C42.2 R55.2 R56.2 U$4.3
N$70: L5.P$2 U$4.20
N$71: C45.2 R57.2 R58.2 U$4.2
PB2: JP1.12 R17.2 U$1.41
PB3: J4.4 JP1.7 U$1.42
PB4/PWM0: JP1.13 U$1.43
PB5/PWM1: JP1.11 U$1.44
SDC0/CLK: RN2.5 U$1.105 U$11.5
SDC0/CMD: RN2.6 U$1.103 U$11.3
SDC0/D0: R1.1 U$1.106 U$11.7
SDC0/D1: R2.1 U$1.107 U$11.8
SDC0/D2: RN2.8 U$1.101 U$11.1
SDC0/D3: RN2.7 U$1.102 U$11.2
SDC1/CLK: JP2.3 U$1.5 U$2.P$17
SDC1/CMD: JP2.4 R36.2 U$1.4 U$2.P$16
SDC1/D0: JP2.2 RN1.5 U$1.3 U$2.P$18
SDC1/D1: JP2.1 RN1.6 U$1.2 U$2.P$19
SDC1/D2: JP2.6 RN1.7 U$1.1 U$2.P$14
SDC1/D3: JP2.5 RN1.8 U$1.128 U$2.P$15
SPD_LED: R52.1 U$1.78
SPI1/CS: JP1.24 R8.2 U2.1 U$1.54
SPI1/MISO: JP1.21 U2.2 U$1.52
SPI1/MOSI: JP1.19 U2.5 U$1.55
SPI1/SCK: JP1.23 U2.6 U$1.53
SVREF: C14.1 C15.2 R13.1 R14.2 U$1.63 U$1.71
TPX1: J-LCD-FFC.37 U$7.2 U$8.2 X2.1
TPX2: J-LCD-FFC.39 U$7.4 U$8.4 X2.3
TPY1: J-LCD-FFC.38 U$7.3 U$8.3 X2.2
TPY2: J-LCD-FFC.40 U$7.5 U$8.5 X2.4
UART0/RX: JP1.10 U$1.49
UART0/TX: JP1.8 U$1.48
UART2/RX/PB1: JP1.16 U$1.40
UART2/TX/PB0: JP1.18 U$1.39
USB/ID: R32.2 U$1.100 U$5.4
USB_D_N: J3.2 U$1.110 U$5.2
USB_D_P: J3.3 U$1.111 U$5.3
V_PWR [pwr]: F1.2 Q3.1 Q3.2
V_USB [pwr]: J3.1 Q4.1 Q4.2 U$5.1
VCC-PE [pwr]: JP3.2 R44.1 R45.1 U$1.12 U$1.29
VLED+ [pwr]: C74.1 C75.1 D1.C J-LCD-FFC.2 J-VLED.1 U$9.5
VLED- [pwr]: J-LCD-FFC.1 J-VLED.2 R47.1 U$9.3
VRA1: C21.2 U$1.117
VRA2: C20.2 R27.2 U$1.118
WL_H_WK: U$2.P$13
Y0_N: J-LVDS.7 U1.41
Y0_P: J-LVDS.8 U1.40
Y1_N: J-LVDS.9 U1.39
Y1_P: J-LVDS.10 U1.38
Y2_N: J-LVDS.11 U1.35
Y2_P: J-LVDS.12 U1.34

## Tracks (layer width: path | path; a pad name or v marks a point on that pad's centre or on a via)
5VNS
  TOP 0.4: F1.1 85.09,12.82 85.29,12.82 85.37,12.82 J-PWR.PWR
  BOTTOM 0.4: J-PWR2.2 J-PWR.PWR
+1V2  (via drill 0.3 pad 0.5)
  TOP 0.178: U$1.25 48.78,32.12 48.56,32.4 | U$1.26 49.06,32.4 49,32.45 48.78,32.62 | U$1.51 45.67,40.04 45.45,39.76 | U$1.19 47.08,30.42 47.04,30.48 47.04,30.61 47.04,30.94 v47.05,30.96 | 37.18,39.12 37.01,39.36 36.9,39.47 U$1.80 | 46.51,38.62 46.8,38.91 U$1.47 | U$1.126 40.58,25.89 40.61,25.91 v41.74,26.15 | U$1.108 35.49,30.99 35.91,31.3 | U$1.56 44.26,41.45 44.22,41.43 43.86,41.35 43.66,41.7 43.66,41.91 43.67,41.98 43.69,42.02 U$1.58 44.82,43.15 44.84,43.18 44.85,43.26 44.85,43.46 v44.84,44.12 43.55,44.96 43.23,44.96 43.12,44.85 U$1.64 | U$1.20 47.37,30.7 47.16,30.91 v47.05,30.96 | U$1.88 34.64,37.21 34.75,37.1 v35.54,37.03 | U$1.21 47.65,30.99 47.59,31.03 47.46,31.04 47.13,31.04 v47.05,30.96 | 48.95,36.08 49.24,36.25 49.35,36.36 U$1.38
  TOP 0.4: C55.1 49.39,28.25 49.25,28.11 49.19,28.05 49.02,28.05 v48.45,28.06 | 43.8,41.05 44.83,40.17 45.45,39.76 45.74,39.26 45.81,39.19 46.1,38.9 46.51,38.62 46.8,38.2 47.08,37.92 48.21,36.79 48.5,36.5 48.95,36.08 48.78,32.62 48.56,32.4 47.94,31.98 47.8,31.84 47.5,31.55 v47.05,30.96 46.67,30.71 v41.74,26.15 | 43.8,41.05 43.86,41.35 | v36.6,31.03 35.91,31.3 v35.54,37.03 37.18,39.12 37.82,39.22 43.8,41.05
  BOTTOM 0.4: 69.14,26.01 57.16,22.33 57.07,22.3 55.39,22.3 55.3,22.33 54.77,22.55 54.7,22.59 54.2,23.02 53.01,24.2 52.97,24.28 52.75,24.81 52.73,24.9 52.45,26.13 52.45,27.07 52.03,31.99 51.68,32.35 51.18,32.35 50.83,31.99 49.76,28.6 49.71,28.54 49.56,28.39 C67.1 49.14,27.97 49,28.11 48.94,28.17 48.77,28.17 v48.45,28.06 v47.05,30.96 46.66,31.34 46.52,31.49 C54.1 | C65.1 44.74,30.27 44.88,30.41 45.44,30.97 45.58,31.11 C54.1 | C64.1 51.39,38.82 51.25,38.96 51.19,39.02 48.7,41.97 48.65,42.03 48.5,42.17 C53.1 48.34,42.85 48.2,42.99 47.6,43.59 47.45,43.74 C52.1 46.37,44.21 46.23,44.35 46.17,44.41 46,44.41 v44.84,44.12 | C56.1 41.73,26.84 41.87,26.7 41.93,26.64 41.93,26.47 v41.74,26.15 | 69.14,26.01 75.23,20.25 75.44,20.04 75.89,19.59 76.2,18.22 77.56,16.36 77.56,16.27 77.56,16.07 C44.2 77.56,14.97 77.56,14.77 77.56,14.13 77.56,13.93 L3.P$1 78.36,13.76 78.56,13.76 79.1,13.76 79.3,13.76 C41.1 79.9,13.84 80.1,13.84 81.07,13.84 81.27,13.84 R7.1 | C54.1 46.36,31.9 46.5,32.04 46.89,32.43 47.03,32.57 C63.1 | v35.54,37.03 36.84,37.47 36.9,37.53 37.04,37.67 C66.1 | C62.1 37.02,31.45 36.88,31.31 v36.6,31.03 | JP12.4 69.4,27.39 69.14,26.01
+1V8  (via drill 0.3 pad 0.5)
  TOP 0.178: U$1.72 39.16,41.73 39.28,41.62 39.59,41.62 40.08,41.94 40.38,42.23 v40.52,42.4 40.52,42.07 40.24,41.79 39.82,41.37 39.68,41.23 37.64,39.66 37.61,39.65 37.3,39.65 37.18,39.75 U$1.79 | U$1.68 40.3,42.87 40.57,42.74 40.61,42.7 40.61,42.67 40.61,42.64 40.57,42.6 40.46,42.54 39.95,42.26 39.8,42.26 39.73,42.3 U$1.70 | U$1.59 43.41,42.3 43.34,42.25 43.19,42.25 42.92,42.28 43,42.42 43,42.43 43.12,42.58 U$1.60 | U$1.61 42.84,42.87 42.64,42.58 | U$1.62 42.56,43.15 42.24,42.74 42.24,42.71 | 41.42,43 41.42,43.05 41.19,43.38 41.19,43.65 41.14,43.71 U$1.65 | U$1.69 40.01,42.58 40.3,42.6 40.41,42.67 40.54,42.67 | U$1.67 40.58,43.15 40.63,43.09 40.78,42.85 | U$1.66 40.86,43.43 40.91,43.37 41.09,42.98 41.09,42.92
  TOP 0.4: 42.92,42.28 42.7,42.51 42.64,42.58 42.24,42.71 41.69,42.74 41.42,43 41.09,42.92 40.78,42.85 40.61,42.67 | 40.61,42.67 v40.52,42.4 | 40.61,42.67 40.54,42.67 | v72.91,20.12 69.4,26.5 69.4,27.39 69.4,29.39 JP12.6
  BOTTOM 0.4: C14.2 38.97,53.58 39.17,53.58 40.31,53.58 40.51,53.58 R13.2 41.21,53.28 41.41,53.28 41.5,53.28 41.61,53.16 41.91,52.59 43.7,48.47 43.76,48.41 43.9,48.27 C47.1 43.83,47.35 43.69,47.21 43.63,47.15 43.63,46.98 43.78,45.99 | 41.5,44.19 41.66,43.15 41.66,42.98 41.61,42.92 41.46,42.78 C50.1 | C51.1 39.91,44.72 40.11,44.72 40.19,44.72 41.5,44.19 | C42.1 75.3,2.25 75.1,2.25 75.01,2.25 74.9,2.37 74.11,3.21 74.11,3.29 74.11,3.49 C43.2 74.11,4.59 74.11,4.79 74.11,4.87 74.33,5.16 | C38.2 44.83,46.4 44.69,46.26 44.63,46.2 44.1,45.84 | 74.33,5.16 74.32,5.38 74.32,5.47 74.32,5.67 L4.P$1 71.72,6.17 71.52,6.17 71.44,6.17 71.32,6.28 71.02,6.66 71.02,7.07 71.02,7.97 71.36,12.13 73.35,18.67 73.35,18.96 73.35,19.59 v72.91,20.12 | R55.1 75.44,5.91 75.24,5.91 75.15,5.91 75.04,5.8 74.86,5.33 74.66,5.13 74.38,5.13 74.33,5.16 | v40.52,42.4 40.69,42.29 40.83,42.15 C50.1 | 41.5,44.19 43.78,45.99 | 44.1,45.84 43.78,45.99 | C39.1 42.65,40.9 42.51,41.04 42.03,41.51 41.89,41.65 C50.1 | JP12.6 61.82,27.23 60.39,27.06 60.19,26.86 59.88,25.48 59.67,25.28 59.22,24.83 56.77,24.01 55.7,24.01 55.69,24.02 55.21,24.47 54.46,25.21 54.46,26.96 53.14,32.36 53.07,32.52 52.68,32.91 52.13,33.79 52.05,33.93 47.75,41.67 47.4,42.02 45.94,43.46 44.59,43.51 44.24,43.87 44.1,45.84
+2V5
  TOP 0.4: C76.1 73.21,14.19 73.41,14.19 73.5,14.19 74.4,14.67 74.49,14.67 74.69,14.67 U$6.5 74.69,14.82 74.69,15.02 74.69,15.1 74.13,16.22 74.13,16.52 74.13,17.07 74.34,17.27 76.47,18.57 76.55,18.57 76.75,18.57 JP3.1
+3V3  (via drill 0.3 pad 0.5)
  TOP 0.178: U$1.109 34.64,29.57 v33.14,28.71 | J-CAM-FFC.2 92.73,28.41 92.64,28.41 92.6,28.41 v91.37,27.75 | RN2.1 22.94,28.08 23.01,28.14 23.34,28.13 23.47,27.99 23.52,27.63 23.46,27.56 RN2.2 | U$8.1 90.7,45.72 90.7,45.63 90.7,45.59 90.65,45.54 90.26,45.28 | U$1.127 39.73,24.48 39.64,24.39 39.62,24.37 39.52,23.98 | U$1.122 39.45,27.03 39.51,27.12 39.51,27.42 v39.64,28.05 | U$1.104 34.36,32.12 34.47,32.23 34.47,32.54 v33.58,35.32 33.33,35.68 33.31,35.71 33.23,35.8 U$1.93 | U1.27 79.66,54.41 79.66,54.32 79.66,54.28 79.6,54.22 79.46,54.08 78.86,53.97 78.77,54.28 78.77,54.32 78.77,54.41 U1.29 | U1.2 69.71,48.13 69.71,48.22 69.71,48.59 69.91,48.61 70.23,48.61 72.3,48.61 72.44,48.6 72.66,48.38 72.66,48.22 72.66,48.13 U1.8 | U$1.85 34.36,39.19 34.21,39.33 34,39.43 v32.61,39.82 | U$1.50 47.08,40.89 47.1,40.92 47.11,41 v47.15,41.42 | U1.21 79.27,48.13 79.27,48.22 79.27,48.38 79.4,48.71 | U1.37 74.77,54.41 74.77,54.32 74.77,54.28 74.85,54.02 75.27,53.6 v77.14,53.05 | v45.69,42.85 45.42,42.9 45.22,42.9 45.14,42.88 45.1,42.87 U$1.57 | RN1.2 44.5,21.29 44.44,21.35 44.07,21.31 43.94,21.17 43.93,20.84 43.99,20.78 RN1.1
  TOP 0.4: 75.59,24.85 86.11,24.03 v87.75,23.66 v91.37,27.75 | RN1.3 45.43,21.5 45.57,21.35 45.8,21.08 | 47.36,49.48 47.36,49.37 47.21,48.77 47.09,48.66 47.01,48.66 46.81,48.66 U2.8 46.81,48.45 46.81,48.25 46.81,48.17 46.93,48.05 48.28,46.93 48.4,46.81 48.4,46.73 48.4,46.53 R8.1 | 39.52,23.98 v42.6,20.82 42.94,20.55 43.56,20.36 43.72,20.36 43.78,20.42 43.93,20.56 RN1.1 | RN2.3 23.73,26.57 23.59,26.42 23.53,26.37 23.34,26.17 | 75.06,21.25 78.22,20.25 78.43,20.04 78.43,18.52 78.43,18.22 78.09,17 78.09,16.92 78.09,16.72 U$6.3 77.29,16.57 77.09,16.57 77,16.57 76.89,16.45 76.73,16.12 76.73,15.57 76.73,15.27 76.89,14.94 77,14.82 77.09,14.82 77.29,14.82 U$6.1 78.09,14.78 78.29,14.78 79.32,14.78 79.52,14.78 C31.1 | 47.36,49.48 v51.41,50.96 51.73,50.99 51.81,50.99 52.01,50.99 U2.3 | 75.06,21.25 74.68,22.76 74.68,23.64 75.59,24.85 | R39.1 82.07,48.72 81.87,48.72 79.57,48.72 79.4,48.71 78.09,50.69 v77.14,53.05 78.35,53.64 78.86,53.97 | U$2.P$9 66.18,11.98 66.38,11.98 67.11,11.98 67.31,11.98 C3.1 67.31,12.47 67.11,12.47 67.02,12.47 66.91,12.58 66.75,13.12 66.75,13.41 66.75,14.71 67.79,15.98 67.79,16.06 67.79,16.27 R9.1 68.39,16.96 68.59,16.96 68.67,16.96 71.47,18.82 71.67,18.82 JP3.3 72.79,19.45 72.99,19.45 73.15,19.52 75.06,21.25 | 22.82,26.6 22.82,26.56 23.09,26.29 23.34,26.17 | RN2.2 23.17,27.13 23.02,26.99 22.92,26.89 22.82,26.6 | 43.78,53.08 34.68,58.95 34.59,58.95 34.39,58.95 JP1.1 33.27,58.95 33.27,58.75 33.27,58.66 29.92,54.19 28.86,45.37 28.18,44.7 27.23,44.7 27.14,44.78 26.67,45.25 26.04,45.25 25.61,44.81 25.61,44.19 25.78,43.61 26.4,42.99 27.93,42.54 28.4,42.34 32.25,40.08 32.26,40.07 v32.61,39.82
  TOP 0.4: JP1.17 53.59,59.19 53.39,59.19 52.13,58.25 43.78,53.08 | JP12.7 JP12.5 73.53,29.39 75.59,24.85 | R39.1 82.67,48.81 82.67,49.02 82.67,49.1 84.45,51.27 84.87,51.68 86.05,51.68 X2.8 89.39,49.84 89.39,49.76 89.39,49.56 C2.1 89.93,48.96 89.93,48.76 89.93,47.64 89.43,46.62 89.37,46.29 89.37,45.7 89.79,45.28 90.26,45.28 | C9.1 17.63,19.36 17.63,19.56 17.63,19.64 v17.35,21.02 | RN1.2 44.93,21 45.07,20.86 45.13,20.8 45.18,20.76 45.47,20.76 45.57,20.86 45.8,21.08 | RN1.4 46.01,22.08 46.15,21.94 46.25,21.84 46.25,21.56 46.13,21.42 45.8,21.08 | R38.1 83.54,46.14 83.54,46.34 83.54,46.42 82.67,47.83 82.67,47.91 82.67,48.12 R39.1 | v45.69,42.85 45.44,44.37 43.79,47.55 43.74,47.66 43.74,48.84 43.74,50.72 43.78,53.08 | U2.7 46.81,49.72 47.01,49.72 47.09,49.72 47.36,49.48 | U$2.P$22 54.23,16.13 54.03,16.13 v53.37,16.13 | v33.14,28.71 32.91,28.45 31.81,27.34 28.27,23.84 27.65,23.64 27.48,23.64 27.42,23.7 27.28,23.84 R2.2 26.52,24.07 26.38,24.21 25.78,24.81 25.64,24.95 R1.2 25.11,25.41 24.97,25.55 24.64,25.88 24.5,26.02 RN2.4 24.24,26.05 24.1,25.91 24.04,25.85 24,25.81 23.72,25.81 23.59,25.93 23.34,26.17 | v18.92,24.47 22.82,26.6 | JP10.17 61.86,46.58 62.06,46.58 67.47,46.99 67.69,47.08 68.6,47.99 68.68,48.2 68.68,48.38 68.96,48.66 69.15,48.72 69.56,48.72 69.71,48.59 | JP5.1 22.8,37.51 22.8,37.31 22.8,37.23 21.8,36.18 21.8,35.55 21.8,34.88 22.07,28.66 22.51,28.21 22.66,28.07 RN2.1
  BOTTOM 0.178: J-LCD-FFC.4 92.98,41.26 93.07,41.26 93.42,41.26 | v91.37,27.75 91.77,27.75 91.86,27.75 J-LCD-FFC.31 92.98,27.79 93.07,27.79 93.21,27.79 93.29,27.83 93.61,28.15 93.73,28.29 93.84,28.39 93.91,28.53 94.04,28.81 | U$7.1 86.39,45.79 86.39,45.7 86.39,45.35
  BOTTOM 0.4: 45.7,39.27 v47.15,41.42 v45.69,42.85 | R36.1 57.72,15.56 57.72,15.36 57.72,15.27 57.6,15.16 57.31,15.07 | 70.08,56.78 v77.14,53.05 79.08,52.48 79.52,52.04 85.89,45.55 86.1,45.35 86.39,45.35 93.22,43.23 93.42,43.02 93.42,41.77 93.42,41.48 93.42,41.26 93.75,40.91 93.97,40.48 94.94,37.79 94.94,37.21 94.91,37.19 94.91,36.61 96.08,33.46 96.08,32.03 95.83,30.9 95.82,30.87 95.19,30.09 94.07,28.98 94.04,28.81 | 45.7,39.27 45.63,38.66 45.63,38.49 45.69,38.43 45.83,38.29 C70.1 46.25,37.87 46.39,37.73 46.45,37.67 51.91,32.9 52.58,32.22 53.91,26.74 53.91,25.1 53.99,24.9 54.89,24 55.37,23.55 55.59,23.46 56.88,23.46 59.45,24.28 60.62,24.98 60.74,25.1 60.74,25.18 60.74,25.39 JP10.1 | R32.1 30.85,31.82 31,31.96 33.6,34.56 | 52.3,14.14 53.57,13.33 53.65,13.33 53.85,13.33 C30.1 | C30.1 54.75,13.33 54.95,13.33 55.03,13.33 55.15,13.45 55.19,13.68 55.4,13.88 57.31,15.07 | 45.7,39.27 45.32,39.3 45.16,39.3 45.1,39.24 44.96,39.1 C61.1 | 70,58.84 69.75,58.97 69.63,59.08 69.63,59.17 69.63,59.37 J-LVDS.1 69.12,60.39 69.12,60.59 J-LVDS.2 | v39.64,28.05 39.93,28.33 40.07,28.47 C57.1 | v33.14,28.71 31.35,29.41 | 33.6,34.56 33.86,34.5 34.03,34.5 34.09,34.55 34.23,34.7 C58.1 34.91,34.53 35.05,34.39 35.63,33.81 35.77,33.67 C59.1 36.24,32.58 36.1,32.44 36.04,32.38 36,31.28 36,30.78 36.35,30.43 38.17,30.33 38.23,30.27 38.37,30.13 C60.1 39.05,29.97 39.19,29.82 39.94,29.08 40.08,28.94 C57.1 | R32.1 30.89,30.93 31.03,30.79 31.09,30.73 31.28,30.03 31.35,29.41 | 52.3,14.14 50.54,13.17 50.45,13.17 50.25,13.17 R19.2 | R10.2 55.07,8.15 55.07,8.35 55.07,8.44 54.75,11.95 54.75,12.03 54.75,12.23 C30.1
  BOTTOM 0.4: C45.1 81.08,2.23 81.28,2.23 81.36,2.23 81.96,2.68 82.07,2.8 82.07,2.88 82.07,3.08 C46.2 | C46.2 82.97,4.18 82.97,4.38 82.97,4.9 82.97,5.1 L5.P$1 82.11,5.6 81.91,5.6 81.82,5.6 80.23,5.91 80.15,5.91 79.95,5.91 R57.1 | J4.1 11.96,57.66 11.96,57.46 11.96,57.38 10.38,52.5 10.38,51.39 10.4,51.34 11.03,50.49 11.03,50.41 11.03,50.21 L2.1 11.93,49.11 11.93,48.91 11.93,48.83 12.05,48.71 12.52,48.41 14.62,47.53 15.64,47.53 15.7,47.5 16.48,46.72 16.51,46.66 16.58,44.41 17.19,43.8 18.18,43.73 18.24,43.7 19.02,42.92 19.43,42.35 22.8,38.92 22.8,38.83 22.8,38.63 JP5.1 | X2.7 X2.8 | R11.2 29.61,32.61 29.75,32.47 30.45,31.77 30.59,31.62 R32.1 | 70.08,56.78 70,58.84 | 33.6,34.56 v33.58,35.32 32.79,36.11 32.65,36.25 C69.1 31.94,37.1 32.08,37.24 32.14,37.3 32.14,37.46 32.01,37.66 32.01,37.95 v32.61,39.82 | v53.37,16.13 52.4,16.11 | JP1.17 54.47,58.95 54.47,58.75 55.87,52.36 56.03,52.18 56.35,51.32 56.35,50.7 55.91,50.26 55.29,50.26 v51.41,50.96 51.06,51.07 50.94,51.19 50.94,51.27 50.94,51.47 C1.1 | C57.1 40.27,28.28 40.41,28.13 40.47,28.08 40.67,27.46 40.67,27.11 v42.6,20.82 50.76,17.9 51.11,17.55 52.4,16.11 | v18.92,24.47 v17.35,21.02 | J-LVDS.3 70,58.84 | JP3.3 71.67,18.82 71.47,18.82 60.42,14.86 60.01,14.86 59.01,14.86 57.37,15 57.31,15.07 | 52.3,14.14 52.4,16.11 | C46.2 82.97,3.08 82.97,2.88 82.97,2.8 83.09,2.68 83.63,2.53 84.93,2.53 85.22,2.53 85.43,2.73 93.77,11.43 93.77,11.44 93.77,12.51 93.77,15.04 93.77,15.05 93.02,15.8 93.01,15.8 91.31,15.95 90.89,16.12 89.83,17.19 89.65,17.61 v87.75,23.66 | U$11.4 18.55,15.53 18.55,15.73 18.55,15.81 25.97,27.75 26.34,28.11 30.02,28.64 30.85,28.97 31.35,29.41
  BOTTOM 0.4: JP10.17 61.62,46.83 61.62,47.03 61.95,47.24 62.03,47.32 62.51,47.8 62.8,48.16 62.8,49.82 62.8,52.13 62.86,52.36 63.12,52.98 63.24,53.18 64.54,54.49 64.74,54.6 65.36,54.86 65.59,54.92 66.11,54.92 70.08,56.78
+3V3A  (via drill 0.3 pad 0.5)
  TOP 0.178: v35.93,26.53 36.32,27.84 36.34,27.88 U$1.115 37.47,29.01 37.57,29.12 37.57,29.42 37.55,29.65 | C72.1 36.03,42.6 36.1,42.54 36.9,41.73 U$1.76
  TOP 0.4: 37.55,29.65 v39.06,38.63 | IC1.2 77.54,6.38 77.34,6.38 76.31,6.38 76.11,6.38 C37.1 75.41,6.64 75.21,6.64 75.13,6.64 75.01,6.76 74.97,6.99 74.76,7.19 73.66,7.19 73.37,7.19 73.16,6.99 v70.57,4.32 | v35.93,26.53 33.72,23.43 33.72,22.81 33.96,16.7 33.96,16.2 33.94,16.1 33.94,16.02 33.94,15.82 C26.2 33.36,15.82 33.36,16.02 v33.36,16.45 | C72.1 35.76,42.49 35.62,42.35 35.56,42.29 v35.12,41.84
  BOTTOM 0.4: v35.12,41.84 35.31,42.1 35.37,42.16 35.51,42.3 | 35.51,42.3 C71.1 35.51,42.3 | v35.93,26.53 35.61,26.34 35.44,26.34 35.38,26.4 35.24,26.54 R29.2 34.57,26.23 34.43,26.09 33.82,25.48 33.68,25.34 C68.1 33,25.02 32.86,25.16 32.8,25.22 32.64,25.22 32.38,24.97 32.31,24.95 32.15,24.95 30.71,23.86 30.65,23.8 30.51,23.66 C16.2 29.32,24.03 29.18,24.17 28.54,24.8 28.4,24.94 C19.2 | v39.06,38.63 35.71,42.1 35.65,42.16 35.51,42.3 | v33.36,16.45 33.36,16.01 33.36,15.81 R30.2 33.82,15.11 34.02,15.11 34.1,15.11 34.22,14.99 40.22,2.85 40.52,2.55 41.62,2.55 42.03,2.55 45.21,2.58 46,2.58 47.14,2 48.1,2 v70.57,4.32
+3V3ANC  (2 unrouted)
  pour BOTTOM: 85.95,8.67 85.95,0.79 90.39,0.79 90.39,8.67
  pour TOP: 83.66,8.54 90.39,8.54 90.39,0.28 85.95,0.28 85.95,4.09 83.66,4.09
+5V  (via drill 0.3 pad 0.5)
  TOP 0.178: J-CAM-FFC.1 93.22,27.91 93.22,27.82 93.22,24.08
  TOP 0.4: 79.79,7.37 v81.03,9.36 82.59,10.87 82.8,11.08 83.34,13.17 84.59,14.7 86.25,18.98 86.54,20.09 86.54,20.18 86.54,20.38 L1.P$1 | 79.79,7.37 79.93,7.17 79.93,5.95 79.93,5.66 79.37,4.79 79.37,4.71 79.37,4.51 IC1.3 77.54,4.08 77.34,4.08 76.41,4.08 76.21,4.08 C36.1 | C73.1 83.63,17.84 83.63,18.04 83.63,19.48 83.63,19.68 U$9.6 83.78,20.28 83.78,20.48 83.78,20.56 83.9,20.68 84.55,20.98 84.85,20.98 86.05,20.98 86.26,20.88 86.34,20.88 86.54,20.88 L1.P$1 | Q3.3 75.31,11.74 75.31,11.54 v75.31,10.55 76.15,7.54 76.5,7.19 77,7.19 77.19,7.37 77.49,7.37 79.72,7.37 79.79,7.37 | L1.P$1 89.14,20.88 89.34,20.88 89.42,20.88 93.22,24.08 93.39,23.99 94.33,23.97 95.59,23.97 95.89,23.97 96.09,24.17 96.94,25.27 97.4,39.38 97.4,46.76 97.4,46.96 R16.2 97.65,47.56 97.85,47.56 97.93,47.56 98.05,47.68 98.35,48.25 98.35,50.1 98.36,54.91 98.36,55.2 97.02,56.75 96.17,57.6 95.88,57.89 94.3,58.14 93.37,58.53 85.87,63.48 85.73,63.54 55.07,64.46 51.9,64.46 50.69,64.46 38.45,63.16 37.13,62.37 36.93,62.37 JP1.4 | v14.97,37.52 14.08,40.61 13.32,45.48 13.01,47.96 13.01,49.33 13.14,49.62 14.1,50.59 33.28,61.53 33.42,61.67 JP1.2
  BOTTOM 0.178: U$4.10 76.63,9.97 76.48,9.91 76.21,9.8 | U$4.8 76.63,9.17 76.47,8.97 76.63,8.77 U$4.7 | U$4.9 76.63,9.57 76.28,9.53 | U$4.16 80.03,9.97 80.17,9.91 v81.03,9.36 | U$4.18 80.03,9.17 80.2,8.97 80.03,8.77 U$4.19
  BOTTOM 0.4: JP1.4 35.81,62.05 35.61,62.05 34.59,62.05 34.39,62.05 JP1.2 | v81.03,9.36 80.2,8.97 | C40.1 82.01,8.86 81.81,8.86 81.73,8.86 v81.03,9.36 | Q4.3 15.8,30.9 15.8,31.1 15.8,31.19 v14.97,37.52 | C35.1 74.71,10.68 74.91,10.68 75,10.68 v75.31,10.55 75.39,9.95 | 75.39,9.95 76.21,9.8 76.28,9.53 76.28,9.43 76.37,9.07 76.47,8.97 | C33.1 81.99,9.84 81.79,9.84 81.71,9.84 v81.03,9.36 | C32.1 74.7,9.76 74.9,9.76 74.98,9.76 75.39,9.95
CLK_N
  TOP 0.152: J-LVDS.15 81.57,58.79 77.88,56.98 77.29,56.5 76.89,56.1 76.78,55.85 76.78,55.82 76.78,55.74 U1.33
CLK_P
  TOP 0.152: J-LVDS.16 84.06,60.27 84.06,59.49 83.51,58.94 78.44,56.85 77.45,56.11 77.28,55.94 77.28,55.82 77.28,55.74 U1.32
CSI_D0/LCD_D2  (via drill 0.3 pad 0.5)
  TOP 0.152: U$1.33 51.86,36.01 51.91,36.06 51.93,36.08 v55.1,36.53 | JP11.12 83.28,36 84.06,35.88 v91.16,33.72 92.61,34.4 92.64,34.4 92.72,34.4 J-CAM-FFC.14 | U1.13 75.14,48.14 75.14,48.22 75.14,48.25 75.09,48.31 74.95,48.45 v74.73,48.62 72.71,49.08 69.95,49.16 69.47,49.16 69.18,49.16 68.97,49.15 68.77,49.12 68.25,48.59 68.23,48.57 68.23,48.3 68.21,48.25 67.43,47.47 67.38,47.45 60.83,47.41 60.38,46.96 60.16,46.74 59.9,45.8 59.68,45.58 59.23,45.13 58.92,45.13 58.29,45.13 58.07,45.35 57.62,45.8 57.62,46.11 57.62,46.74 58.36,48.13 58.42,48.18 JP10.20
  BOTTOM 0.152: v55.1,36.53 55.74,38.83 56.55,44.61 57.01,46.99 57.59,47.57 58.04,48.02 58.44,48.05 58.44,48.12 JP10.20 | J-LCD-FFC.23 91.85,31.8 91.77,31.8 91.63,31.8 91.44,31.99 91.39,32.06 91.39,32.37 91.39,32.44 91.45,32.51 91.49,32.55 91.49,32.94 v91.16,33.72 | JP11.12 80.42,38.42 79.81,40.29 78.55,44.23 78.23,44.55 78.1,44.93 77.82,45.21 76.34,45.83 75.97,45.84 75.69,46.12 v74.73,48.62
CSI_D1/LCD_D3  (via drill 0.3 pad 0.5)
  TOP 0.152: JP11.11 92.61,35.04 92.64,35.04 92.72,35.04 J-CAM-FFC.15 93.37,34.9 93.44,34.9 93.47,34.9 94.53,34.73 94.81,34.45 94.81,34.06 v94.47,31.45 | v76.17,46.32 76.17,46.72 76.17,46.8 U1.15 76.14,48.14 76.14,48.22 76.14,48.25 76.09,48.31 75.95,48.45 74.93,49.1 72.84,49.38 70.07,49.47 69.34,49.47 69.05,49.47 68.85,49.45 68.65,49.42 67.94,48.72 67.92,48.7 67.92,48.4 67.28,47.76 66.38,47.76 62.06,48.49 61.99,48.49 JP10.19 | v55.14,35.55 53.94,35.02 51.93,33.11 51.91,33.09 51.86,33.04 U$1.32
  BOTTOM 0.152: JP11.11 82.06,37.88 81.28,38 80.73,38.55 80.12,40.35 78.86,44.33 78.84,44.37 78.53,44.68 78.4,45.06 77.94,45.52 v76.17,46.32 | JP10.19 60.61,48.49 60.54,48.49 59.17,47.82 58.16,47.71 57.72,47.26 57.32,46.87 56.85,44.52 56.05,38.79 55.58,36.33 v55.14,35.55 | J-LCD-FFC.24 92.99,31.3 93.07,31.3 93.1,31.3 v94.47,31.45
CSI_D2/LCD_D4  (via drill 0.3 pad 0.5)
  TOP 0.152: JP11.10 83.28,34 89.59,33.27 90.45,32.83 v91.01,32.74 92.61,33.4 92.64,33.4 92.72,33.4 J-CAM-FFC.12 | U1.16 76.65,46.8 76.65,46.72 76.65,46.12 v76.14,45.35 | U$1.31 51.57,32.75 51.63,32.7 51.65,32.68 51.73,32.67 51.92,32.67 54.07,34.71 55.34,35.08 55.61,35.33 56,35.33 56.28,35.05 56.71,34.52 57.16,33.44 57.16,32.9 57.64,31.32 57.77,30.62 58.22,30.17 58.35,30.04 61.52,30.04 61.71,30.04 62.16,30.48 62.29,30.62 62.29,30.81 62.29,33.98 61.85,34.42 61.71,34.56 60.76,34.81 60.45,35.12 60,35.57 59.75,36.52 59.31,36.96 59.17,37.1 58.35,37.66 58.22,37.79 57.77,38.24 57.77,38.43 57.77,41.6 58.36,43.05 58.42,43.1 JP10.16
  BOTTOM 0.152: JP11.10 80.42,36.42 77.94,43.97 77.66,44.25 77.42,44.25 v76.14,45.35 75.85,45.53 75.39,45.99 70.25,51.54 69.22,52.58 68.84,52.74 67.19,53.21 65.84,53.21 65.57,53.1 64.62,52.15 64.51,51.88 64.51,50.53 64.52,49.91 64.52,49.26 64.52,47.73 64.52,47.7 63.66,45.36 63.61,45.24 62.6,43.19 62.28,42.88 61.84,42.43 60.89,42.18 60.44,41.73 60.31,41.6 59.75,40.78 59.62,40.64 59.17,40.2 58.98,40.2 58.35,40.2 58.22,40.33 57.77,40.78 57.77,40.97 57.77,41.6 58.44,42.97 58.44,43.04 JP10.16 | J-LCD-FFC.25 91.85,30.8 91.77,30.8 91.74,30.8 91.69,30.84 91.54,31.03 91.09,31.84 v91.01,32.74
CSI_D3/LCD_D5  (via drill 0.3 pad 0.5)
  TOP 0.152: v72.19,51.31 75.33,50.26 75.47,50.2 76.82,49.3 77.16,48.96 77.64,48.46 77.64,48.22 77.64,48.14 U1.18 77.78,46.8 77.78,46.72 77.78,46.69 77.82,46.27 77.82,45.8 v77.62,44.73 | JP11.9 89.69,33.58 v90.65,33.31 90.96,33.24 91.36,33.24 92.61,33.9 92.64,33.9 92.72,33.9 J-CAM-FFC.13 | v55.8,34.85 54.19,34.41 52.04,32.36 51.6,32.36 51.52,32.37 51.37,32.4 51.34,32.42 51.29,32.47 U$1.30
  BOTTOM 0.152: JP11.9 82.06,35.88 81.28,36 80.73,36.55 80.12,38.35 78.25,44.1 77.92,44.42 v77.62,44.73 | J-LCD-FFC.26 91.85,30.3 91.77,30.3 91.74,30.3 91.69,30.34 91.39,30.72 91.23,30.9 90.78,31.72 90.54,32.55 90.54,32.94 v90.65,33.31 | v55.8,34.85 56.19,36.08 56.66,38.71 57.46,44.26 57.78,44.58 58.22,45.02 58.67,45.02 59.3,45.02 60.54,44.04 60.61,44.04 JP10.15 61.62,44.41 61.62,44.49 62.02,44.52 62.47,44.96 63.05,45.54 63.91,47.83 63.91,47.85 63.91,49.13 63.91,49.79 63.9,50.42 63.9,52 63.9,52.01 64.1,52.49 64.11,52.5 65.22,53.61 65.23,53.62 65.71,53.82 65.72,53.82 67.31,53.82 67.32,53.82 69,53.33 69.52,53.11 69.58,53.08 v72.19,51.31
CSI_D4/LCD_D6  (via drill 0.3 pad 0.5)
  TOP 0.152: JP11.8 83.28,32 84.06,32 88.94,32.66 89.34,32.66 90.2,32.22 90.29,32.21 90.69,31.96 91.34,31.96 92.61,32.4 92.64,32.4 92.72,32.4 J-CAM-FFC.10 93.37,32.4 93.44,32.4 93.47,32.4 93.54,32.35 93.67,32.21 93.69,31.12 v93.85,30.66 | U1.19 78.28,48.14 78.28,48.22 78.28,48.25 v78.4,48.62 | v56.23,34.33 55.97,34.14 52.73,31.41 52.57,31.35 51.66,31.19 51.2,31.19 50.88,31.51 50.88,31.59 50.77,31.8 50.74,31.82 50.69,31.87 U$1.28
  BOTTOM 0.152: J-LCD-FFC.27 92.99,29.8 93.07,29.8 93.1,29.8 93.15,29.84 v93.85,30.66 | 60.06,42.96 59.75,44.14 59.31,44.58 59.17,44.72 58.54,44.72 58.35,44.72 57.9,44.27 57.77,44.14 56.97,38.67 56.28,34.65 v56.23,34.33 | JP10.14 59.08,41.87 59.08,41.95 60.06,42.96 | JP11.8 83.28,32 84.06,32 84.61,32.55 84.61,33.33 84.61,37.33 84.06,37.88 83.28,38 82.73,38.55 82.61,39.33 82.06,39.88 81.28,40 80.73,40.55 79.49,45.07 v78.4,48.62 71.99,50.83 69.39,52.83 69.38,52.84 68.91,53.04 67.25,53.52 65.78,53.52 65.4,53.36 64.36,52.32 64.21,51.94 64.21,50.47 64.21,49.85 64.21,49.2 64.21,47.79 64.21,47.77 63.35,45.42 63.35,45.41 62.29,43.32 62.16,43.18 61.71,42.74 61.52,42.74 60.89,42.74 60.06,42.96
CSI_D5/LCD_D7  (via drill 0.3 pad 0.5)
  TOP 0.152: JP11.7 88.81,32.97 89.46,32.97 90.32,32.53 90.39,32.51 90.43,32.49 90.82,32.27 91.21,32.27 92.61,32.9 92.64,32.9 92.72,32.9 J-CAM-FFC.11 93.37,33.04 93.44,33.04 93.47,33.04 93.54,33.09 93.67,33.22 v94.33,34.25 | U1.20 78.64,46.8 78.64,46.72 78.64,46.69 78.1,44.53 v77.46,43.77 | v56.17,33.66 52.9,31.15 52.64,31.05 51.78,30.89 51.07,30.89 50.57,31.39 50.54,31.45 50.48,31.51 50.46,31.54 50.41,31.59 U$1.27
  BOTTOM 0.152: v56.17,33.66 56.43,33.85 56.71,34.13 57.77,39.06 57.9,39.19 58.35,39.64 59.3,39.89 60.54,40.87 60.61,40.87 JP10.13 61.99,41.5 62.06,41.5 62.07,41.51 62.9,43.06 63.87,45.06 63.97,45.3 64.81,47.62 64.82,47.66 64.82,47.68 64.82,49.3 64.82,49.95 64.82,50.59 64.82,51.82 64.88,51.98 65.74,52.84 65.9,52.91 67.13,52.91 68.77,52.43 69.04,52.32 69.99,51.37 75.66,45.15 75.94,44.87 v77.46,43.77 77.66,43.33 77.77,43.06 80.73,34.55 81.28,34 82.06,33.88 JP11.7 | J-LCD-FFC.28 92.99,29.3 93.07,29.3 93.1,29.3 94.05,30.18 94.33,30.46 94.95,31.25 95.2,32.2 95.2,33.28 95.19,33.3 v94.33,34.25
CSI_D6/LCD_D10  (via drill 0.3 pad 0.5)
  TOP 0.152: J-CAM-FFC.8 92.72,31.39 92.64,31.39 92.61,31.39 91.57,31.35 90.46,31.35 90.42,31.37 90.03,31.6 v88.72,31.68 84.06,30 83.28,30 JP11.6 | U1.4 70.78,46.8 70.78,46.72 70.78,46.56 70.8,46.49 70.85,46.43 70.85,46.03 70.57,45.75 60.89,42.18 60.44,41.73 60.31,41.6 59.16,39.33 59.11,39.27 JP10.12 | v56.68,33.24 53.07,30.9 52.7,30.74 51.94,30.51 50.92,30.51 49.76,30.61 49.73,30.64 49.65,30.72 49.59,30.77 U$1.24